# Altium PCB M3 ICE.PcbDoc (part 2 of 2)
Units mil, origin at the board's own origin, x right, y up, seen from the top; angles counter-clockwise.
Board outline 4160 x 4350 mil, 4 copper layers (Top Layer, Mid-Layer 1, Mid-Layer 2, Bottom Layer); 223 components, 229 nets, 850 pads, 124 vias.
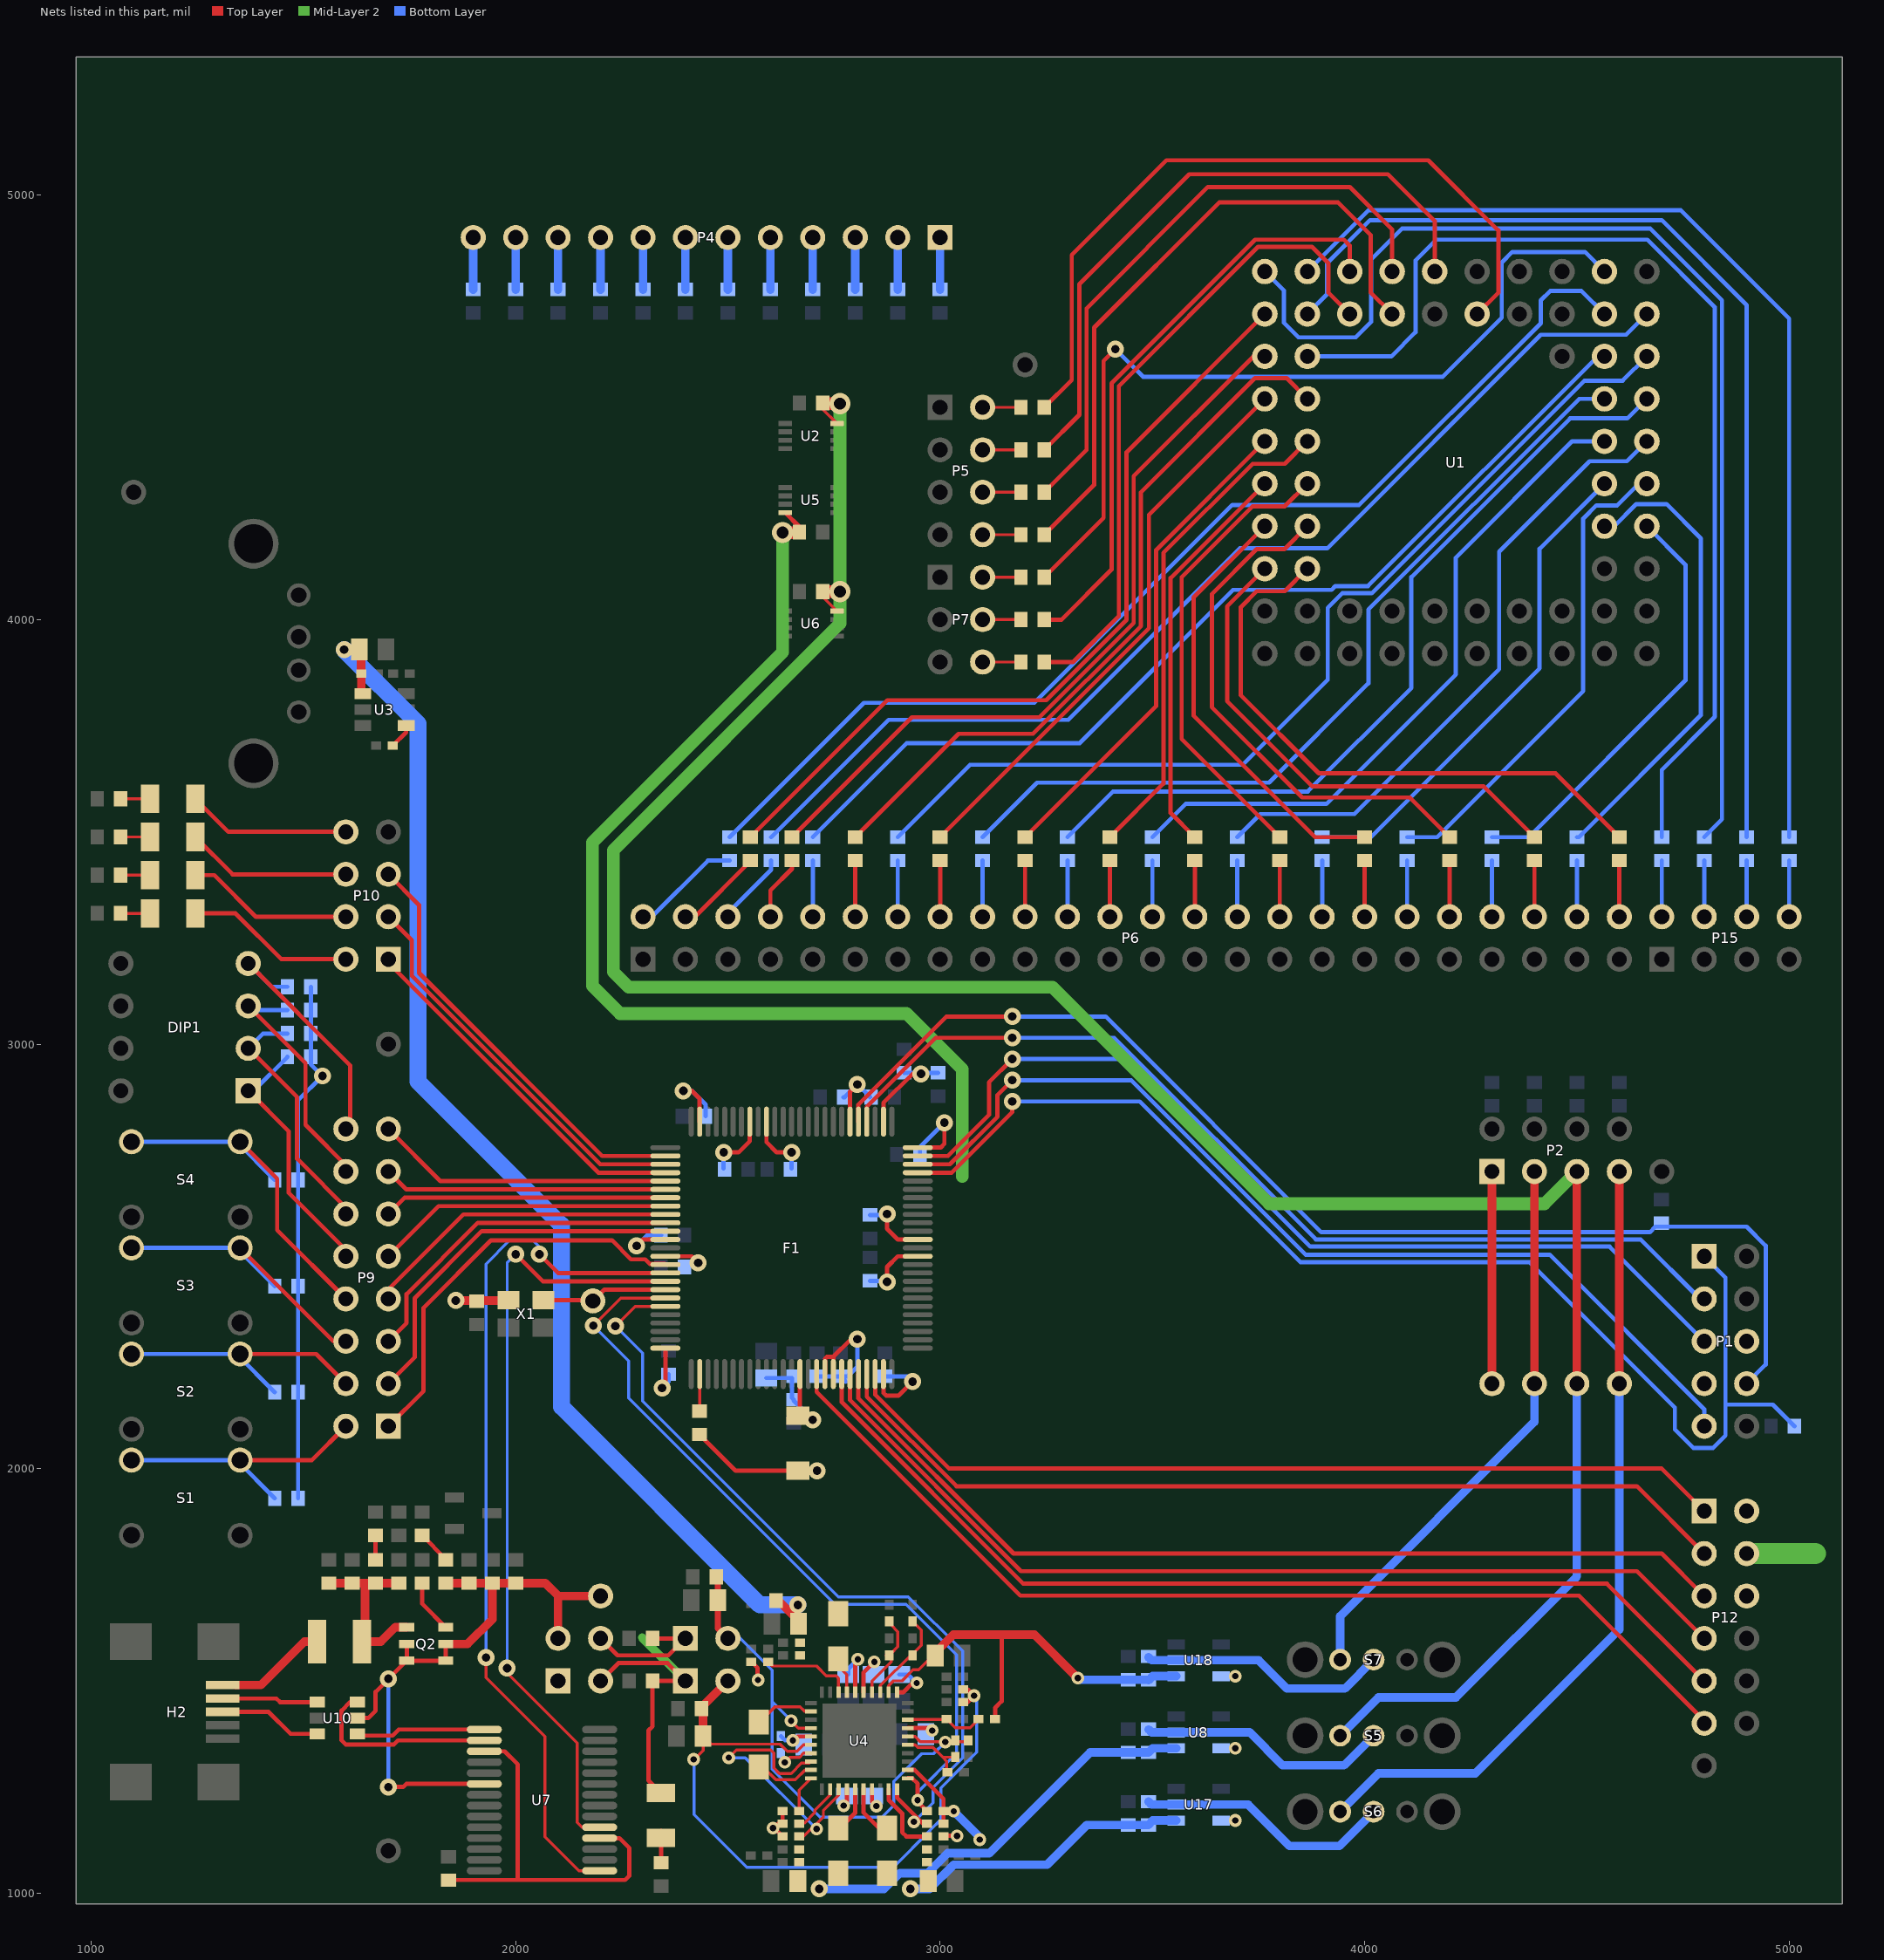
[diagram p4: the nets of this part, all layers, seen from the top]

## Via types
v1: diameter 40, hole 20, Top Layer to Bottom Layer, 71 vias
v2: diameter 30, hole 15, Top Layer to Bottom Layer, 40 vias
v3: diameter 50, hole 28, Top Layer to Bottom Layer, 9 vias
v4: diameter 200, hole 120, Top Layer to Bottom Layer, 4 vias

## Nets (pads, with @x,y where several pads share a name; then routed paths per layer and width w, separated by ;. In a path a pad name is that pad's centre, name@x,y a point inside that pad or via, vN(x,y) a via of type N, cw(c..) or ccw(c..) an arc to the next point about the centre after c; other vN are vias at no path point) (continued)
NetC48_2: C48.2 C51.2 F2.2 Q2.4 R61.2 R63.2 | length 424.6
  Top Layer w20: C51.2@1560,1730 R63.2@1615,1730 1645,1730 ; C48.2@1725,1730 R61.2@1670,1730 1645,1730 ; Q2.4@1743.46,1626.3 1716.3,1626.3 1682.56,1592.56 F2.2@1638.15,1592.56 1645,1599.41 1645,1730
NetC49_1: C49.1 R60.1 | length 77.8
  Top Layer w10: C49.1@1780,1842.44 R60.1@1835,1787.44
NetC50_2: C50.2 U7.4 U7.17 | length 932.8
  Top Layer w10: C50.2@1848,1031 2005,1031 ; U7.17@1926.17,1334.16 1973.84,1334.16 2005,1303 2005,1031 ; U7.4@2197.83,1129.43 2244.57,1129.43 2268,1106 2268,1041 2258,1031 2005,1031
NetC52_2: C52.2 R61.1 | length 57.3
  Top Layer w10: R61.1@1670,1785.12 C52.2@1670,1842.44
NetC62_2: C62.2 R56.1 U4.3 | length 213.7
  Top Layer w7: U4.3@2859.06,1473.35 2859.06,1488.85 R56.1@2932.76,1562.56 ; R56.1@2935,1563.18 2955.34,1583.52 2955.34,1619.97 C62.2@2935,1640.31
NetC63_2: C63.2 R57.1 U4.4 | length 190.5
  Top Layer w7: U4.4@2839.37,1473.35 2839.37,1499.37 2885,1545 C63.2@2885,1560.31 ; C63.2@2883.43,1563.66 2900.34,1580.58 2900.34,1615.85 R57.1@2884.3,1631.89
  Top Layer w15: C63.2@2877.21,1560.31 C63.2@2880,1560.31
NetDIP1_1: DIP1.1 P9.10 R69.2 | length 610
  Top Layer w10: DIP1.1@1370,2890 1465,2795 1465,2650 P9.10@1610,2505
  Bottom Layer w10: DIP1.1@1370,2890 1382.44,2890 R69.2@1462.44,2970
NetDIP1_2: DIP1.2 P9.12 R70.2 | length 591.3
  Top Layer w10: DIP1.2@1370,2990 1485,2875 1485,2730 P9.12@1610,2605
  Bottom Layer w10: DIP1.2@1370,2990 1405,3025 R70.2@1462.44,3025
NetDIP1_3: DIP1.3 P9.14 R71.2 | length 581
  Top Layer w10: DIP1.3@1370,3090 1505,2955 1505,2810 P9.14@1610,2705
  Bottom Layer w10: DIP1.3@1370,3090 1380,3080 R71.2@1462.44,3080
NetDIP1_4: DIP1.4 P9.16 R72.2 | length 599.6
  Top Layer w10: DIP1.4@1370,3190 1610,2950 P9.16@1610,2805
  Bottom Layer w10: DIP1.4@1370,3190 1425,3135 R72.2@1462.44,3135
NetF1_16: F1.16 P12.11 | length 2435.9
  Top Layer w10: F1.16@2709.06,2222.76 2709.06,2180.94 3189,1701 4505.25,1701 P12.11@4787.44,1418.81
NetF1_19: F1.19 P12.9 | length 2370
  Top Layer w10: F1.19@2768.11,2222.76 2768.11,2156.68 3195.79,1729 4571,1729 P12.9@4800,1500
NetF1_20: F1.20 P12.7 | length 2306.3
  Top Layer w10: F1.20@2787.8,2222.76 2787.8,2161.04 3190.36,1758.47 4641.53,1758.47 P12.7@4800,1600
NetF1_21: F1.21 P12.5 | length 2242.7
  Top Layer w10: F1.21@2807.48,2222.76 2807.48,2165.39 3172.88,1800 4700,1800 P12.5@4800,1700
NetF1_22: F1.22 P12.3 | length 2179
  Top Layer w10: F1.22@2827.17,2222.76 2827.17,2169.75 3038.44,1958.47 4641.53,1958.47 P12.3@4800,1800
NetF1_23: F1.23 P12.1 | length 2115.3
  Top Layer w10: F1.23@2846.85,2222.76 2846.85,2174.11 3020.96,2000 4700,2000 P12.1@4800,1900
NetF1_77: F1.77 P10.5 | length 1021.3
  Top Layer w10: P10.5@1700,3400 1772.5,3327.5 1772.5,3167.5 2203.46,2736.54 F1.77@2352.76,2736.54
NetF1_78: F1.78 P10.3 | length 943.5
  Top Layer w10: P10.3@1700,3300 1755.5,3244.5 1755.5,3160.46 2199.11,2716.85 F1.78@2352.76,2716.85
NetF1_79: F1.79 P10.1 | length 857.7
  Top Layer w10: P10.1@1700,3191.92 2194.75,2697.17 F1.79@2352.76,2697.17
NetF1_80: F1.80 P9.15 | length 703.5
  Top Layer w10: P9.15@1700,2800 1822.52,2677.48 F1.80@2352.76,2677.48
NetF1_81: F1.81 P9.13 | length 670.2
  Top Layer w10: P9.13@1700,2700 1742.2,2657.8 F1.81@2352.76,2657.8
NetF1_82: F1.82 P9.11 | length 668.5
  Top Layer w10: P9.11@1700,2600 1738.11,2638.11 F1.82@2352.76,2638.11
NetF1_83: F1.83 P9.9 | length 701.8
  Top Layer w10: P9.9@1700,2500 1818.43,2618.43 F1.83@2352.76,2618.43
NetF1_84: F1.84 P9.7 | length 760.8
  Top Layer w10: P9.7@1684.5,2393.58 1684.5,2406.42 1876.82,2598.74 F1.84@2352.76,2598.74
NetF1_85: F1.85 P9.5 | length 808.2
  Top Layer w10: P9.5@1700,2300 1743,2343 1743,2411 1911.06,2579.06 F1.85@2352.76,2579.06
NetF1_86: F1.86 P9.3 | length 883
  Top Layer w10: P9.3@1700,2200 1762,2262 1762,2401 1920.37,2559.37 F1.86@2352.76,2559.37
NetF1_90: F1.90 P9.1 | length 972.8
  Top Layer w10: P9.1@1700,2100 1783,2183 1783,2379 1942,2538 2226.75,2538 2271.75,2493 2305.22,2493 2315.81,2482.41 2350.98,2482.41 F1.90@2352.76,2480.63
NetF2_1: F2.1 H2.1 | length 234.3
  Top Layer w20: H2.1@1340,1490 1400,1490 1502.56,1592.56 F2.1@1531.85,1592.56
NetH2_2: H2.2 U10.1 | length 196.3
  Top Layer w10: H2.2@1340,1458.5 1436.5,1458.5 1445.04,1449.96 U10.1@1532.76,1449.96
NetH2_3: H2.3 U10.3 | length 214.2
  Top Layer w10: H2.3@1340,1427.01 1417.99,1427.01 1469.84,1375.16 U10.3@1532.76,1375.16
NetI1_1: I1.1 U4.7 | length 70.1
  Top Layer w7: I1.1@2760,1535 2780.32,1514.68 U4.7@2780.32,1473.35
NetI2_1: I2.1 U4.25 | length 108.5
  Top Layer w10: I2.1@2760,1158.94 2769.94,1158.94 2800,1189 U4.25@2800,1245
NetI3_1: I3.1 U4.26 | length 116.8
  Top Layer w10: U4.26@2819.68,1245 2819.68,1189.32 2855.85,1153.15 I3.1@2865.79,1153.15
NetI4_1: I4.1 U4.12 | length 140
  Top Layer w7: I4.1@2575,1403.15 2610.85,1439 2670,1439 2680.93,1428.07 U4.12@2695.67,1428.07
NetI4_2: I4.2 U4.19 | length 131.9
  Top Layer w7: I4.2@2585,1295 2613,1267 2658.53,1267 2681.8,1290.28 U4.19@2695.67,1290.28
NetLED1_1: LED1.1 P10.2 | length 399.6
  Top Layer w10: LED1.1@1245.15,3308 1340,3308 1448,3200 P10.2@1600,3200
NetLED1_2: LED1.2 R5.2 | length 69.3
  Top Layer w7: R5.2@1069.56,3308 LED1.2@1138.85,3308
NetLED2_1: LED2.1 P10.4 | length 395.4
  Top Layer w10: LED2.1@1245.15,3398 1290,3398 1388,3300 P10.4@1600,3300
NetLED2_2: LED2.2 R6.2 | length 69.3
  Top Layer w7: R6.2@1069.56,3398 LED2.2@1138.85,3398
NetLED3_1: LED3.1 P10.6 | length 391.3
  Top Layer w10: LED3.1@1245.15,3488 1333.15,3400 P10.6@1600,3400
NetLED3_2: LED3.2 R7.2 | length 69.3
  Top Layer w7: R7.2@1069.56,3488 LED3.2@1138.85,3488
NetLED4_1: LED4.1 P10.8 | length 387.2
  Top Layer w10: LED4.1@1245.15,3578 1323.15,3500 P10.8@1600,3500
NetLED4_2: LED4.2 R8.2 | length 69.3
  Top Layer w7: R8.2@1069.56,3578 LED4.2@1138.85,3578
NetLED9_2: LED9.2 R98.2 | length 75.3
  Top Layer w10: R98.2@2343,1071.56 LED9.2@2343,1146.85
NetP4_1: P4.1 R77.1 | length 122.4
  Bottom Layer w20: R77.1@3000,4777.56 P4.1@3000,4900
NetP4_2: P4.2 R78.1 | length 122.4
  Bottom Layer w20: R78.1@2900,4777.56 P4.2@2900,4900
NetP4_3: P4.3 R79.1 | length 122.4
  Bottom Layer w20: R79.1@2800,4777.56 P4.3@2800,4900
NetP4_4: P4.4 R80.1 | length 122.4
  Bottom Layer w20: R80.1@2700,4777.56 P4.4@2700,4900
NetP4_5: P4.5 R81.1 | length 122.4
  Bottom Layer w20: R81.1@2600,4777.56 P4.5@2600,4900
NetP4_6: P4.6 R82.1 | length 122.4
  Bottom Layer w20: R82.1@2500,4777.56 P4.6@2500,4900
NetP4_7: P4.7 R83.1 | length 122.4
  Bottom Layer w20: R83.1@2400,4777.56 P4.7@2400,4900
NetP4_8: P4.8 R84.1 | length 122.4
  Bottom Layer w20: R84.1@2300,4777.56 P4.8@2300,4900
NetP4_9: P4.9 R85.1 | length 122.4
  Bottom Layer w20: R85.1@2200,4777.56 P4.9@2200,4900
NetP4_10: P4.10 R95.1 | length 122.4
  Bottom Layer w20: R95.1@2100,4777.56 P4.10@2100,4900
NetP4_11: P4.11 R96.1 | length 122.4
  Bottom Layer w20: R96.1@2000,4777.56 P4.11@2000,4900
NetP4_12: P4.12 R97.1 | length 122.4
  Bottom Layer w20: R97.1@1900,4777.56 P4.12@1900,4900
NetP5_2: P5.2 R41.2 | length 90.4
  Top Layer w7: P5.2@3100,4500 R41.2@3190.44,4500
NetP5_4: P5.4 R42.2 | length 90.4
  Top Layer w7: P5.4@3100,4400 R42.2@3190.44,4400
NetP5_6: P5.6 R92.2 | length 90.4
  Top Layer w7: P5.6@3100,4300 R92.2@3190.44,4300
NetP5_8: P5.8 R99.2 | length 90.4
  Top Layer w7: P5.8@3100,4200 R99.2@3190.44,4200
NetP6_2: P6.2 R17.2 | length 258.9
  Bottom Layer w10: P6.2@2300,3300 2320.56,3300 2453,3432.44 R17.2@2504,3432.44
NetP6_4: P6.4 R18.2 | length 185.3
  Top Layer w10: P6.4@2421.99,3300 R18.2@2553,3431.01
NetP6_6: P6.6 R19.2 | length 174.7
  Bottom Layer w10: P6.6@2500,3300 2500,3309 2602,3411 R19.2@2602,3432.44
NetP6_8: P6.8 R20.2 | length 153.6
  Top Layer w10: P6.8@2600,3300 2600,3362 2651,3413 R20.2@2651,3432.44
NetP6_10: P6.10 R21.2 | length 132.4
  Bottom Layer w10: P6.10@2700,3300 R21.2@2700,3432.44
NetP6_12: P6.12 R22.2 | length 132.4
  Top Layer w10: P6.12@2800,3300 R22.2@2800,3432.44
NetP6_14: P6.14 R23.2 | length 132.4
  Bottom Layer w10: P6.14@2900,3300 R23.2@2900,3432.44
NetP6_16: P6.16 R24.2 | length 132.4
  Top Layer w10: P6.16@3000,3300 R24.2@3000,3432.44
NetP6_18: P6.18 R25.2 | length 132.4
  Bottom Layer w10: P6.18@3100,3300 R25.2@3100,3432.44
NetP6_20: P6.20 R26.2 | length 132.4
  Top Layer w10: P6.20@3200,3300 R26.2@3200,3432.44
NetP6_22: P6.22 R27.2 | length 132.4
  Bottom Layer w10: P6.22@3300,3300 R27.2@3300,3432.44
NetP6_24: P6.24 R28.2 | length 132.4
  Top Layer w10: P6.24@3400,3300 R28.2@3400,3432.44
NetP6_26: P6.26 R29.2 | length 132.4
  Bottom Layer w10: P6.26@3500,3300 R29.2@3500,3432.44
NetP6_28: P6.28 R30.2 | length 132.4
  Top Layer w10: P6.28@3600,3300 R30.2@3600,3432.44
NetP6_30: P6.30 R31.2 | length 132.4
  Bottom Layer w10: P6.30@3700,3300 R31.2@3700,3432.44
NetP6_32: P6.32 R32.2 | length 132.4
  Top Layer w10: P6.32@3800,3300 R32.2@3800,3432.44
NetP6_34: P6.34 R33.2 | length 132.4
  Bottom Layer w10: P6.34@3900,3300 R33.2@3900,3432.44
NetP6_36: P6.36 R34.2 | length 132.4
  Top Layer w10: P6.36@4000,3300 R34.2@4000,3432.44
NetP6_38: P6.38 R35.2 | length 132.4
  Bottom Layer w10: P6.38@4100,3300 R35.2@4100,3432.44
NetP6_40: P6.40 R36.2 | length 132.4
  Top Layer w10: P6.40@4200,3300 R36.2@4200,3432.44
NetP6_42: P6.42 R37.2 | length 132.4
  Bottom Layer w10: P6.42@4300,3300 R37.2@4300,3432.44
NetP6_44: P6.44 R38.2 | length 132.4
  Top Layer w10: P6.44@4400,3300 R38.2@4400,3432.44
NetP6_46: P6.46 R39.2 | length 132.4
  Bottom Layer w10: P6.46@4500,3300 R39.2@4500,3432.44
NetP6_48: P6.48 R40.2 | length 132.4
  Top Layer w10: P6.48@4600,3300 R40.2@4600,3432.44
NetP7_2: P7.2 R100.2 | length 90.4
  Top Layer w7: P7.2@3100,4100 R100.2@3190.44,4100
NetP7_4: P7.4 R101.2 | length 90.4
  Top Layer w7: P7.4@3100,4000 R101.2@3190.44,4000
NetP7_6: P7.6 R102.2 | length 90.4
  Top Layer w7: P7.6@3100,3900 R102.2@3190.44,3900
NetP9_2: P9.2 R65.2 S1.1 | length 657
  Top Layer w10: S1.1@1350.91,2020 1520,2020 P9.2@1600,2100
  Bottom Layer w10: S1.1@1095,2020 1342.44,2020 R65.2@1432.44,1930
NetP9_4: P9.4 R66.2 S2.1 | length 652.8
  Top Layer w10: S2.1@1350.91,2270 1530,2270 P9.4@1600,2200
  Bottom Layer w10: S2.1@1095,2270 1342.44,2270 R66.2@1432.44,2180
NetP9_6: P9.6 R67.2 S3.1 | length 714.9
  Top Layer w10: S3.1@1350.91,2520 1570.91,2300 P9.6@1600,2300
  Bottom Layer w10: S3.1@1095,2520 1342.44,2520 R67.2@1432.44,2430
NetP9_8: P9.8 R68.2 S4.1 | length 847.9
  Top Layer w10: S4.1@1350.91,2770 1438,2682.91 1438,2562 P9.8@1600,2400
  Bottom Layer w10: S4.1@1095,2770 1342.44,2770 R68.2@1432.44,2680
NetP15_2: P15.2 R73.2 | length 132.4
  Bottom Layer w10: P15.2@4700,3300 R73.2@4700,3432.44
NetP15_4: P15.4 R74.2 | length 132.4
  Bottom Layer w10: P15.4@4800,3300 R74.2@4800,3432.44
NetP15_6: P15.6 R75.2 | length 132.4
  Bottom Layer w10: P15.6@4900,3300 R75.2@4900,3432.44
NetP15_8: P15.8 R76.2 | length 132.4
  Bottom Layer w10: P15.8@5000,3300 R76.2@5000,3432.44
NetQ2_3: Q2.3 R59.2 | length 126.5
  Top Layer w10: R59.2@1780,1730 1780,1681.3 Q2.3@1835,1626.3
NetR1_1: R1.1 S5.2 U8.2 | length 594.3
  Bottom Layer w20: R1.1@3491,1385.56 3497.99,1378.57 U8.2@3556,1378.57 3729.43,1378.57 3807,1301 3951.26,1301 S5.2@4021.26,1371
NetR2_1: R2.1 S6.2 U17.2 | length 607.1
  Bottom Layer w20: R2.1@3491,1215.56 3497.99,1208.57 U17.2@3556,1208.57 3725.57,1208.57 3823.14,1111 3940.26,1111 S6.2@4021.26,1192
NetR3_1: R3.1 S7.2 U18.2 | length 588.9
  Bottom Layer w20: R3.1@3491,1555.56 3497.99,1548.57 U18.2@3556,1548.57 3750.43,1548.57 3817,1482 3953.26,1482 S7.2@4021.26,1550
NetR17_1: R17.1 U1.B2 | length 2647.9
  Bottom Layer w10: R17.1@2504,3487.56 2820.44,3804 3222,3804 3688,4270 3987,4270 4415,4698 4415,4752 4437,4774 4511,4774 U1.B2@4565,4720
NetR18_1: R18.1 U1.K2 | length 1953.8
  Top Layer w10: R18.1@2553,3487.56 2875.44,3810 3249.92,3810 3439,3999.08 3439,4394 U1.K2@3765,4720
NetR19_1: R19.1 U1.A2 | length 2573.5
  Bottom Layer w10: R19.1@2602,3487.56 2878.44,3764 3302,3764 3706,4168 3912,4168 4415,4671 4616,4671 U1.A2@4665,4720
NetR20_1: R20.1 U1.K3 | length 1785.7
  Top Layer w10: R20.1@2651,3487.56 2933.44,3770 3233.96,3770 3456,3992.04 3456,4338 3738,4620 U1.K3@3765,4620
NetR21_1: R21.1 U1.B3 | length 2329.4
  Bottom Layer w10: R21.1@2700,3487.56 2921.44,3709 3329,3709 3690,4070 3922,4070 3931,4079 4008,4079 U1.B3@4557,4628
NetR22_1: R22.1 U1.J4 | length 1717.8
  Top Layer w10: R22.1@2800,3487.56 3043.44,3731 3219,3731 3473,3985 3473,4300 3742,4569 3816,4569 U1.J4@3865,4520
NetR23_1: R23.1 U1.A3 | length 2333.7
  Bottom Layer w10: R23.1@2900,3487.56 3070.44,3658 3713,3658 3913,3858 3913,4028 3947,4062 4017,4062 4518,4563 4608,4563 U1.A3@4665,4620
NetR24_1: R24.1 U1.K4 | length 1349.3
  Top Layer w10: R24.1@3000,3487.56 3492,3979.56 3492,4247 U1.K4@3765,4520
NetR25_1: R25.1 U1.B4 | length 1994.2
  Bottom Layer w10: R25.1@3100,3487.56 3228.44,3616 3775,3616 4009,3850 4009,4023.4 4505.6,4520 U1.B4@4565,4520
NetR26_1: R26.1 U1.K5 | length 1166.5
  Top Layer w10: R26.1@3200,3487.56 3509,3796.56 3509,4164 U1.K5@3765,4420
NetR27_1: R27.1 U1.A4 | length 1945.5
  Bottom Layer w10: R27.1@3300,3487.56 3407.44,3595 3866,3595 4110,3839 4110,4099.96 4484.04,4474 4619,4474 U1.A4@4665,4520
NetR28_1: R28.1 U1.J5 | length 1169.5
  Top Layer w10: R28.1@3400,3487.56 3526,3613.56 3526,4156.96 3736.04,4367 3812,4367 U1.J5@3865,4420
NetR29_1: R29.1 U1.B5 | length 1612.3
  Bottom Layer w10: R29.1@3500,3487.56 3578.44,3566 3910,3566 4215,3871 4215,4146 4489,4420 U1.B5@4565,4420
NetR30_1: R30.1 U1.K6 | length 948
  Top Layer w10: R30.1@3600,3487.56 3543,3544.56 3543,4098 U1.K6@3765,4320
NetR31_1: R31.1 U1.A5 | length 1513.5
  Bottom Layer w10: R31.1@3700,3487.56 3754.44,3542 3976,3542 4317,3883 4317,4160 4530,4373 4618,4373 U1.A5@4665,4420
NetR32_1: R32.1 U1.J6 | length 1095.2
  Top Layer w10: R32.1@3800,3487.56 3569,3718.56 3569,4099.96 3736.04,4267 3812,4267 U1.J6@3865,4320
NetR33_1: R33.1 U1.B6 | length 1175
  Bottom Layer w10: R33.1@3900,3487.56 4014.56,3487.56 4412,3885 4412,4167 U1.B6@4565,4320
NetR34_1: R34.1 U1.K7 | length 1037.2
  Top Layer w10: U1.K7@3765,4220 3597,4052 3597,3774 3883.44,3487.56 R34.1@4000,3487.56
NetR35_1: R35.1 U1.A6 | length 1147.6
  Bottom Layer w10: R35.1@4100,3487.56 4170.56,3487.56 4515,3832 4515,4238 4546,4269 4595,4269 4646,4320 U1.A6@4665,4320
NetR36_1: R36.1 U1.J7 | length 1244.2
  Top Layer w10: U1.J7@3865,4220 3811,4166 3746,4166 3640,4060 3640,3794 3853,3581 4106.56,3581 R36.1@4200,3487.56
NetR37_1: R37.1 U1.A7 | length 1009.7
  Bottom Layer w10: R37.1@4300,3487.56 4386.56,3487.56 4756,3857 4756,4129 U1.A7@4665,4220
NetR38_1: R38.1 U1.K8 | length 1205.6
  Top Layer w10: U1.K8@3765,4120 3676,4031 3676,3808 3877,3607 4280.56,3607 R38.1@4400,3487.56
NetR39_1: R39.1 U1.B7 | length 1109.2
  Bottom Layer w10: R39.1@4500,3487.56 4504.56,3487.56 4792,3775 4792,4191 4711,4272 4640,4272 4588,4220 U1.B7@4565,4220
NetR40_1: R40.1 U1.J8 | length 1431.8
  Top Layer w10: U1.J8@3865,4120 3812,4067 3746,4067 3708.52,4029.52 3708.52,3821.48 3892,3638 4449.56,3638 R40.1@4600,3487.56
NetR41_1: R41.1 U1.E2 | length 1769.1
  Top Layer w10: R41.1@3245.56,4500 3310,4564.44 3310,4859 3533,5082 4150,5082 4315,4917 4315,4770 U1.E2@4265,4720
NetR42_1: R42.1 U1.F1 | length 1533
  Top Layer w10: R42.1@3245.56,4400 3328,4482.44 3328,4790 3587,5049 4055,5049 4165,4939 U1.F1@4165,4820
NetR51_2: R51.2 R53.1 U4.38 | length 183
  Top Layer w7: U4.38@2924.02,1408.39 2924.63,1409 R53.1@3015.32,1409 ; R53.1@3015.32,1410 3035.66,1389.66 3070.85,1389.66 R51.2@3090.31,1409.13
NetR54_2: R54.2 R55.1 U4.35 | length 163.4
  Top Layer w7: U4.35@2924.02,1349.33 2940.67,1349.33 2947,1343 2982.86,1343 3005.55,1320.32 ; R54.2@3015.31,1285 3015.31,1310.55 3005.55,1320.32 ; R55.1@3036,1320.32 3005.55,1320.32
NetR73_1: R73.1 U1.J3 | length 2539
  Bottom Layer w10: U1.J3@3865,4620 4063,4620 4120,4677 4120,4846 4169,4895 4666,4895 4825,4736 4825,3771 4700,3646 R73.1@4700,3487.56
NetR74_1: R74.1 U1.K1 | length 2729.7
  Bottom Layer w10: U1.K1@3765,4820 3810,4775 3810,4699 3844,4665 3979,4665 4015,4701 4015,4848 4088,4921 4673,4921 4842,4752 4842,3529.56 R74.1@4800,3487.56
NetR75_1: R75.1 U1.J2 | length 2505.6
  Bottom Layer w10: U1.J2@3865,4720 3911,4766 3911,4839 4013,4941 4700,4941 4900,4741 R75.1@4900,3487.56
NetR76_1: R76.1 U1.J1 | length 2521.7
  Bottom Layer w10: U1.J1@3865,4820 4009,4964 4745,4964 5000,4709 R76.1@5000,3487.56
NetR88_1: R88.1 U4.22 | length 105.2
  Top Layer w7: 2680,1165 2705,1190 2705,1195 2740.94,1230.94 U4.22@2740.94,1245
NetR89_1: R89.1 U4.29 | length 168.6
  Top Layer w10: U4.29@2878.74,1245 2878.74,1219.53 2910.62,1187.65 2910.62,1143.19 2920.47,1133.35 R89.1@2960.12,1133.35
NetR90_1: R90.1 U4.17 | length 68.8
  Top Layer w7: v2@2635,1310 2645,1320 2668.86,1320 2678.51,1329.65 U4.17@2695.67,1329.65
  other v2: 2634,1308
NetR91_1: R91.1 U4.8 | length 214.9
  Top Layer w7: R91.1@2594.68,1545 2604.68,1535 2708.85,1535 2732.03,1511.82 2755,1511.82 2760.63,1506.19 U4.8@2760.63,1473.35
NetR92_1: R92.1 U1.G1 | length 1453.1
  Top Layer w10: R92.1@3245.56,4300 3345,4399.44 3345,4733 3631,5019 3965,5019 4065,4919 U1.G1@4065,4820
NetR93_2: R93.2 U4.20 | length 88.7
  Top Layer w7: R93.2@2668.11,1193.35 2668.11,1243.03 U4.20@2695.67,1270.59
NetR94_1: R94.1 U3.1 | length 60.6
  Top Layer w10: R94.1@1710.68,3703 1742.18,3734.5 U3.1@1742.18,3750.6
NetR99_1: R99.1 U1.G2 | length 1548.9
  Top Layer w10: R99.1@3245.56,4200 3363,4317.44 3363,4688 3658,4983 3937,4983 4014,4906 4014,4771 U1.G2@4065,4720
NetR100_1: R100.1 U1.B1 | length 2002.3
  Top Layer w10: R100.1@3245.56,4100 3385,4239.44 3385,4609 v1(3413,4637)
  Bottom Layer w10: v1(3413,4637) 3478,4572 4184,4572 4323,4711 4323,4841 4348,4866 4519,4866 U1.B1@4565,4820
NetR101_1: R101.1 U1.H1 | length 1414.1
  Top Layer w10: R101.1@3245.56,4000 3286,4000 3404,4118 3404,4557 3742,4895 3951,4895 3965,4881 U1.H1@3965,4820
NetR102_1: R102.1 U1.H2 | length 1547.9
  Top Layer w10: R102.1@3245.56,3900 3313,3900 3421,4008 3421,4549.96 3749.04,4878 3876,4878 3915,4839 3915,4770 U1.H2@3965,4720
NetU7_15: U7.15 U10.4 | length 306.6
  Top Layer w10: U10.4@1627.24,1375.16 1631.46,1370.94 1710,1370.94 1724.39,1385.34 U7.15@1926.17,1385.34
NetU7_16: U7.16 U10.6 | length 459.6
  Top Layer w10: U10.6@1627.24,1449.96 1609.96,1449.96 1590,1430 1590,1360 1599.64,1350.36 1713.46,1350.36 1722.84,1359.75 U7.16@1926.17,1359.75
PMU_SCL: F1.95 R58.1 U4.30 | length 1895.2
  Top Layer w7: v1(2235,2336) 2281.2,2382.2 F1.95@2352.76,2382.2
  Top Layer w10: U4.30@2898.43,1245 2898.43,1225.04 R58.1@2960.12,1163.35
  Bottom Layer w7: v1(2235,2336) 2299,2272 2299,2159 2760,1698 2925,1698 3053,1570 3053,1319 2983,1249 2983,1213 v2(2938,1168)
PMU_SDA: F1.94 R86.1 U4.31 | length 1907.6
  Top Layer w7: v1(2183,2337) 2247.89,2401.89 F1.94@2352.76,2401.89
  Top Layer w10: U4.31@2924.02,1270.59 2934.41,1270.59 2947,1258 v2(2947,1219) 2947,1215.09 R86.1@2968.74,1193.35
  Bottom Layer w7: v1(2183,2337) 2266,2254 2266,2166 2752,1680 2920,1680 3039,1561 3039,1330 2947,1238 v2(2947,1219)
POR: F1.2 R9.1 | length 86.7
  Top Layer w7: R9.1@2433.46,2136.02 F1.2@2433.46,2222.76
SYS_CLK: F1.93 TP1.1 X1.3 | length 296.1
  Top Layer w10: X1.3@2065.68,2396.96 TP1.1@2180.04,2396.96 ; TP1.1@2182,2395 2208.57,2421.57 F1.93@2352.76,2421.57
TCK: F1.47 P1.1 R10.1 | length 2993.8
  Top Layer w10: F1.47@2947.24,2697.17 3027.17,2697.17 3170,2840 v1(3170,2865)
  Bottom Layer w10: v1(3170,2865) 3470,2865 3849,2486 4389,2486 4731,2144 4731,2092 4774,2049 4821,2049 4850,2078 4850,2151 ; P1.1@4800,2500 4850,2450 4850,2151 ; R10.1@5012.56,2100 4961.56,2151 4850,2151
TDI: F1.48 P1.9 | length 2325.7
  Top Layer w10: F1.48@2947.24,2716.85 3022.81,2716.85 3135,2829.04 3135,2880 v1(3170,2915)
  Bottom Layer w10: v1(3170,2915) 3450,2915 3861,2504 4436,2504 4800,2140 P1.9@4800,2100
TDO: F1.54 P1.3 | length 2320.1
  Top Layer w10: F1.54@2827.17,2817.24 2827.17,2852.41 2989.76,3015 v1(3170,3015)
  Bottom Layer w10: v1(3170,3015) 3410,3015 3885,2540 4650,2540 P1.3@4790,2400
TMS: F1.49 P1.5 | length 2267.9
  Top Layer w10: F1.49@2947.24,2736.54 3018.45,2736.54 3115,2833.08 3115,2910 v1(3170,2965)
  Bottom Layer w10: v1(3170,2965) 3430,2965 3872,2523 4577,2523 P1.5@4800,2300
TRST: F1.55 P1.8 R11.1 | length 2841.8
  Top Layer w10: F1.55@2807.48,2817.24 2807.48,2857.48 3015,3065 v1(3170,3065)
  Bottom Layer w10: v1(3170,3065) 3390,3065 3898,2557 4672,2557 4685,2570 4900,2570 4945,2525 4945,2245 P1.8@4900,2200
USB_UART_RXD: F1.92 U7.5 | length 1866.9
  Top Layer w7: v1(1980,1530) 1980,1519 2145,1354 2145,1166.43 2156.41,1155.02 U7.5@2197.83,1155.02
  Top Layer w10: v1(2000,2505) 2063.74,2441.26 F1.92@2352.76,2441.26
  Bottom Layer w7: v1(1980,1530) 1980,2485 v1(2000,2505) v1@2015,2505
USB_UART_TXD: F1.91 U7.1 | length 2062.7
  Top Layer w7: v1(1930,1555) 1930,1508 2069,1369 2069,1133 2149.34,1052.66 U7.1@2197.83,1052.66
  Top Layer w10: v1(2056,2505) 2100.06,2460.94 F1.91@2352.76,2460.94
  Bottom Layer w7: v1(1930,1555) 1930,2482 1985,2537 2041,2537 v1@2073,2505
VCC_1P2: C3.2 C4.2 C5.2 C6.2 C9.2 C10.2 C11.2 C12.2 C13.2 C14.2 C26.2 C54.2 F1.17 F1.18 F1.24 F1.37 F1.39 F1.50 F1.66 F1.68 F1.74 F1.89 FB1.1 P12.2 P16.1 R9.2 TP18.1 U5.8 | length 4807.1
  Top Layer w10: TP18.1@2200,1600 2240,1560 2360,1560 P16.1@2400,1600 C26.2@2322.56,1600 ; F1.89@2352.76,2500.32 2414.68,2500.32 v1(2430,2485) ; v1(2395,2890) 2415,2890 2433.46,2871.54 F1.74@2433.46,2817.24 ; R9.2@2433,2080.44 2518.44,1995 FB1.1@2665,1995 ; v1(2490,2745) 2525,2745 2551.57,2771.57 F1.68@2551.57,2817.24 ; F1.66@2590.94,2817.24 2590.94,2769.06 2615,2745 v1(2650,2745) ; U5.8@2635,4252 2668.44,4218.56 C54.2@2668.44,4206 ; F1.17@2728.74,2222.76 2728.74,2258.74 2733.43,2263.43 2748.43,2263.43 ; F1.18@2748.43,2222.76 2748.43,2263.43 ; v1(2805,2305) 2790,2305 2748.43,2263.43 ; F1.24@2866.54,2222.76 2866.54,2178.46 2873,2172 2902,2172 v1(2935,2205) ; v1(2875,2440) 2875,2475 2900.32,2500.32 F1.37@2947.24,2500.32 ; v1(2875,2600) 2875,2565 2900.32,2539.68 F1.39@2947.24,2539.68 ; F1.50@2947.24,2756.22 3001.22,2756.22 3010,2765 v1(3010,2815)
  Top Layer w30: v3(2629,4205) C54.2@2667.44,4205
  Mid-Layer 2 w30: v3(2629,4205) 2629,3923 2181,3475 2181,3137 2246,3072 2921,3072 3052,2941 3052,2688
  Bottom Layer w10: v1(2395,2890) 2415,2890 2447.56,2857.44 C10.2@2447.56,2830 ; C5.2@2490,2707.44 v1(2490,2745) ; C9.2@2650,2707.44 v1(2650,2745) ; C3.2@2710,2217.44 C13.2@2765,2217.44 ; C13.2@2777.44,2205 C13.2@2765,2217.44 ; v1(2805,2305) 2805,2240 2782.44,2217.44 C13.2@2765,2217.44 ; C4.2@2835,2442.44 v1@2872.56,2442.44 ; C11.2@2835,2597.56 v1@2872.56,2597.56 ; C14.2@2870,2217.44 2922.56,2217.44 v1(2935,2205) ; C12.2@2952.56,2740 2952.56,2757.56 v1(3010,2815)
  other v1: 2710,1995
VCC_B0: C1.2 C7.2 C8.2 C17.2 C18.2 C19.2 C20.2 C34.2 F1.52 F1.56 F1.87 F1.100 LED9.1 P1.6 P1.7 P11.1 P12.4 R58.2 R65.1 R66.1 R67.1 R68.1 R69.1 R70.1 R71.1 R72.1 R86.2 TP17.1 U4.32 X1.4 | length 3214.5
  Top Layer w10: TP17.1@2200,1500 2242,1542 2358,1542 P11.1@2400,1500 C34.2@2322.56,1500 2322.56,1392.81 2313,1383.25 2313,1265.15 LED9.1@2342,1236.15 ; v1(2285,2525) 2299.68,2539.68 F1.87@2352.76,2539.68 ; v1(2345,2190) 2352.76,2197.76 F1.100@2352.76,2283.78 ; F1.56@2787.8,2817.24 2787.8,2887.8 v1(2805,2905) ; F1.52@2866.54,2817.24 2866.54,2861.54 2935,2930 v1(2955,2930) ; U4.32@2924.02,1290.28 2940,1290.28 3008.11,1222.17 R58.2@3008.11,1163.35
  Top Layer w20: v1(1859,2396) X1.4@1982.04,2396
  Mid-Layer 2 w20: 2298,1602 P11.1@2400,1500
  Mid-Layer 2 w50: P12.4@4900,1800 5062,1800
  Bottom Layer w10: R65.1@1487.56,1930 R66.1@1487.56,2180 R67.1@1487.56,2430 R68.1@1487.56,2680 1487.56,2867.56 v1(1545,2925) 1517.56,2952.44 R69.1@1517.56,2970 R70.1@1517.56,3025 R71.1@1517.56,3080 R72.1@1517.56,3135 ; v1(2285,2525) 2310,2550 C7.2@2342.44,2550 ; v1(2345,2190) 2360,2205 C8.2@2360,2222.44 ; C20.2@2772.56,2875 2775,2875 v1(2805,2905) C18.2@2835,2875 ; C19.2@2915,2932.44 v1@2952.56,2932.44 ; v1@2957.56,2932.56 C17.2@2995,2932.56
  Bottom Layer w20: v2(3032,1193) v2@3093,1132
  other v2: 3093,1126
VCC_GOC: C25.2 C27.2 C61.1 I1.2 R12.1 R14.2 R15.1 U3.4 | length 2927.3
  Top Layer w20: C61.1@1631.5,3930 1636,3925.5 1636,3873.32 R12.1@1636.32,3873 U3.4@1636.32,3828.91 ; R14.2@2607.56,1689 2618.82,1689 C27.2@2666.5,1641.33
  Bottom Layer w40: v1(1596,3929) 1770,3755 1770,2912 2108,2574 2108,2146 2575,1679 v1(2665,1679)
VCC_M3_0P6: P2.3 S7.3 TP21.1 | length 1339.5
  Top Layer w20: TP21.1@4400,2200 P2.3@4400,2700
  Bottom Layer w20: S7.3@3942.52,1550 3942.52,1652.52 4400,2110 TP21.1@4400,2200
VCC_M3_1P2: C31.2 C55.2 P2.5 S5.3 TP16.1 U2.8 U6.8 | length 5965.3
  Top Layer w7: C55.2@2723.56,4066 2723.56,4053.49 U6.8@2757.05,4020 ; C31.2@2723.56,4510 2723.56,4495.49 U2.8@2757.05,4462
  Top Layer w20: TP16.1@4500,2200 P2.5@4500,2700
  Top Layer w30: C55.2@2723.56,4066 v3(2764,4066) ; C31.2@2724.56,4509 v3(2764,4509)
  Mid-Layer 2 w30: v3@2764,4518 2764,3991 2230,3457 2230,3170 2266,3134 3265,3134 3775,2624 4424,2624 P2.5@4500,2700
  Bottom Layer w20: S5.3@3942.52,1371 4032.52,1461 4215,1461 4500,1746 TP16.1@4500,2200
VCC_M3_VBATT: P2.7 S6.3 TP14.1 | length 1914.2
  Top Layer w20: TP14.1@4600,2200 P2.7@4600,2700
  Bottom Layer w20: S6.3@3942.52,1192 4032.52,1282 4261,1282 4600,1621 TP14.1@4600,2200
VCC_PLF: C2.2 C15.2 C16.2 F1.14 FB1.2 | length 267.4
  Top Layer w10: FB1.2@2669.68,2129.61 F1.14@2669.68,2222.76
  Bottom Layer w10: C2.2@2590,2213.5 2651.06,2213.5 C15.2@2651.06,2166.5 ; C15.2@2655,2162.56 2655,2160 v1(2700,2115)
VCC_PRE: C30.1 C33.1 C37.1 C39.1 C40.1 C42.1 C43.1 P8.1 P12.6 R87.2 R88.2 R89.2 R90.2 R91.2 R93.1 U4.1 U4.5 U4.6 U4.15 U4.24 U4.27 U4.37 U8.5 U17.5 U18.5 | length 676.8
  Top Layer w10: R91.2@2555.31,1545 2570,1530.31 v2@2570,1505 ; R87.2@2628.74,1133.35 2612.09,1150 2605,1150 2618.35,1163.35 R88.2@2628.74,1163.35 R93.1@2628.74,1193.35 ; v2@2655,1360 2664.02,1369.02 U4.15@2695.67,1369.02 ; v2@2775,1210 2780.31,1215.31 U4.24@2780.31,1245 ; U4.6@2800,1473.35 v2@2800,1540 ; U4.5@2819.68,1473.35 2819.68,1519.68 v2(2845,1545) ; U4.27@2839.37,1245 2839.37,1215.63 v2(2850,1205) ; U4.1@2898.43,1473.35 2913.35,1473.35 2935,1495 v2(2945,1495) ; U4.37@2924.02,1388.7 v2@2976.3,1388.7 ; R89.2@3009.76,1135 v2(3040,1135)
  Bottom Layer w10: R90.2@2625,1369.69 2634.69,1360 v2@2655,1360 ; C33.1@2783.43,1514.84 2783.43,1528.43 v2@2805,1550 ; C42.1@2903.43,1514.84 2925.16,1514.84 v2(2945,1495)
  other v2: 2606,1153 3695,1171.2 2773,1206 3695,1341.2 2653,1360 2981,1383 2571,1502 3695,1511.2 2806,1551
VCC_SOL: P2.1 TP27.1 | length 500
  Top Layer w20: TP27.1@4300,2200 P2.1@4300,2700
VCC_USB: C46.2 C47.2 C53.2 P8.2 Q2.1 Q2.2 Q2.5 Q2.6 R60.2 TP19.1 U7.20 U10.5 | length 1549
  Top Layer w10: U10.5@1627.24,1412.56 1652.56,1412.56 1670,1430 1670,1474.09 Q2.6@1743.46,1547.56 ; v1(1700,1250) 1735,1250 1742.39,1257.39 U7.20@1926.17,1257.39 ; Q2.5@1743.46,1586.93 Q2.6@1743.46,1547.56 ; Q2.2@1835,1586.93 Q2.1@1835,1547.56 Q2.6@1743.46,1547.56
  Top Layer w20: Q2.2@1835,1586.93 1886.93,1586.93 1945,1645 C46.2@1945,1730 ; R60.2@1835,1730 C47.2@1890,1730 C46.2@1945,1730 ; P8.2@2100,1600 2100,1700 ; TP19.1@2200,1700 2100,1700 ; C46.2@1945,1730 C53.2@2000,1730 2070,1730 2100,1700
  Bottom Layer w10: v1(1700,1250) v1(1700,1505)
VCCP_ICE_1P2: C45.1 C65.1 P16.2 R4.1 R55.2 U4.14 U4.36 | length 1344.3
  Top Layer w7: v2(2649,1406) 2666.3,1388.7 U4.14@2695.67,1388.7 ; U4.36@2924.02,1369.02 2940.98,1369.02 2953,1357 C45.1@3066,1357
  Top Layer w15: R4.1@2476.5,1741.06 C65.1@2476.5,1690 2476.5,1623.5 P16.2@2500,1600
  Bottom Layer w7: P16.2@2500,1600 2529,1600 2604,1525 2604,1451 ; v2(2649,1406) 2604,1451 ; v2(3012,1356) 2984.5,1328.5 2956.44,1328.5 2891,1263.06 2891,1207 2863,1179 2717,1179 2604,1292 2604,1451
VCCP_ICE_SYS: C35.2 C44.2 P11.2 R45.2 R49.1 U4.16 | length 1698.1
  Top Layer w7: v2@2420,1315 2441.5,1336.5 C35.2@2441.5,1370 ; C35.2@2449.65,1361.85 2460.5,1351 2623,1351 2640,1334 2663.06,1334 2678.39,1349.33 U4.16@2695.67,1349.33
  Top Layer w10: C44.2@3054.69,1450 3065,1450 v2(3080,1465) 3065,1480 R49.1@3054.68,1480
  Top Layer w20: C35.2@2441.5,1370 2441.5,1441.5 P11.2@2500,1500
  Bottom Layer w7: v2@2420,1315 2410,1315 2420,1305 2420,1185.2 2544.2,1061 2889.86,1061 2977.5,1148.64 2977.5,1148.76 3002,1173.26 3002,1248.06 3044.44,1290.5 3044.5,1290.5 3086,1332 3086,1459 v2(3080,1465)
  other v2: 2419,1315
VCCP_M3_0P6: C38.2 R3.2 R51.1 R52.2 U4.2 U18.1 | length 991
  Top Layer w7: U4.2@2878.74,1473.35 2878.74,1488.74 2890,1500 2910,1500 2936,1526 2949.5,1526 C38.2@2983.5,1560
  Top Layer w10: R51.1@3129.68,1410 3129.68,1436.68 3145,1452 3145,1605.31
  Top Layer w20: C38.2@2988.5,1560 2988.5,1566.33 3031.18,1609 3222,1609 v2(3324.28,1506.72)
  Bottom Layer w20: v2(3324.28,1506.72) 3328.56,1502.44 R52.2@3443,1502.44 R3.2@3491,1502.44 ; R3.2@3491,1501.44 3500.73,1511.17 U18.1@3556,1511.17
VCCP_M3_1P2: C29.2 C36.2 I2.2 R1.2 R13.2 R44.1 U8.1 | length 978.2
  Bottom Layer w20: v1(2715,1010) 2867.85,1010 2904.98,1047.13 2970.87,1047.13 3017.75,1094 3116,1094 3353.44,1331.44 R13.2@3443,1331.44 R1.2@3491,1331.44 3500.73,1341.17 U8.1@3556,1341.17
VCCP_M3_VBATT: C32.2 C41.2 I3.2 R2.2 R16.2 R47.1 U17.1 | length 692.3
  Bottom Layer w20: v1(2930,1010) 2975,1010 3032,1067 3252,1067 3345.44,1160.44 R2.2@3491,1160.44 ; R2.2@3491,1161.44 3500.73,1171.17 U17.1@3556,1171.17
WAKE: R87.1 U4.18 U4.23 | length 688.5
  Top Layer w7: v2(2502,1319) 2519.88,1336.88 2601.12,1336.88 2608,1330 2608,1295.12 2621.12,1282 2649,1282 2673,1306 2691.71,1306 U4.18@2695.67,1309.96 ; R87.1@2668.11,1133.35 2678.35,1133.35 2725,1180 2725,1195 2760.63,1230.63 U4.23@2760.63,1245
  Bottom Layer w7: v2(2502,1319) 2541,1319 v2(2709.07,1150.93)
pads on no net: D2.2 F1.3 F1.4 F1.5 F1.6 F1.7 F1.8 F1.10 F1.11 F1.13 F1.15 F1.53 H2.4 P1.4 P3.2 P3.3 P12.8 P12.10 R97.2 S5.1 S5.4 S6.1 S6.4 S7.1 S7.4 U1.A1 U1.A10 U1.B8 U1.B9 U1.B10 U1.C2 U1.C3 U1.C9 U1.C10 U1.D9 U1.D10 U1.E9 U1.E10 U1.F9 U1.F10 U1.G9 U1.G10 U1.H9 U1.H10 U1.J10 U2.2 U4.21 U4.28 U5.2 U7.2 U7.3 U7.6 U7.8 U7.9 U7.10 U7.11 U7.12 U7.13 U7.14 U7.19 U7.22 U7.23 U7.24 U7.27 U7.28 X1.1
copper on no net:
  other v4: 1100,1100 1100,5100 5000,5100

## Polygon pours and split planes (outlines as drawn)
no net on Top Overlay "Mid-Layer 1-No Net" (solid): 3686.36,2006.18 3686.36,2096.59 3720.4,2096.59 3720.4,2226.78 3686.75,2226.53 3686.75,2317.53 3824.75,2317.53 3905.75,2201.46 3984.75,2317.53 4120.75,2317.53 4120.75,2226.53 4090.75,2226.53 4090.75,2096.53 4120.75,2096.53 4120.75,2006.53 3954.75,2006.53 3954.75,2096.53 3992.75,2096.53 3992.75,2172.53 3905.75,2056.81 3818.75,2172.53 3818.75,2096.59 3852.79,2096.59 3852.79,2006.18
VCC_1P2 on Mid-Layer 2 "Mid-Layer 1-No Net" (solid, pour order 10): 4549,1575 4806,1832 4958,1832 5007,1881 5007,1952 4930,2029 3436,2029 3105,2360 3105,2700 2995,2810 2935,2810 2850,2725 2675,2725 2635,2765 2635,2855 2555,2935 2405,2935 2350,2880 2350,1625 2400,1575
VCC_PRE on Mid-Layer 2 "Bottom Layer-No Net 1" (solid, pour order 14): 2065,1555 2025,1515 2025,1480 2385,1120 4764,1120 5007,1364 5008,1716 4958,1766 4740,1766 4549,1575 2300,1575 2280,1555
VCC_B0 on Mid-Layer 2 "Mid-Layer 1-No Net" (solid, pour order 11): 5115,1000 5115,2250 4930,2435 4855,2435 4685,2265 4685,2074 4730,2029 5007,2029 5007,1364 4764,1120 2385,1120 2025,1480 2025,1515 2065,1555 2280,1555 2350,1625 2350,2880 2405,2935 2555,2935 2635,2855 2635,2765 2675,2725 2850,2725 2985,2860 2985,2940 2885,3040 1500,3040 1340,2880 1340,2010 2350,1000
M3_VCC_1P2 on Mid-Layer 2 "Mid-Layer 2-No Net" (solid, pour order 12): 4449,2769 4449,2825 4477,2853 4522,2853 4550,2825 4550,2749 4430,2629 4243,2629 3660,3212 3660,4054 3660,4103 4070,4513 4328,4771 4393,4771 4415,4749 4415,4559 3930,4074 3930,3194 4355,2769 4355,2757 4369,2743 4423,2743 4449,2769
M3_VCC_0P6 on Mid-Layer 2 "Mid-Layer 2-No Net" (solid, pour order 13): 4449,2769 4423,2743 4369,2743 4355,2757 4355,4499 4415,4559 4415,4749 4393,4771 4234,4771 4211,4794 4211,4857 4259,4905 4367,4905 4415,4857 4415,4807 4451,4771 4485,4771 4613,4643 4613,4099 4642,4070 4689,4070 4708,4051 4708,3084 4449,2825
M3_VCC_BAT on Mid-Layer 2 "Mid-Layer 2-No Net" (solid, pour order 15): 4550,2769 4574,2745 4638,2745 4952,3059 4952,3173 4952,4620 4664,4908 4466,4908 4415,4857 4415,4807 4451,4771 4485,4771 4613,4643 4613,4099 4642,4070 4689,4070 4708,4051 4708,2983 4550,2825 4550,2769
GND on Mid-Layer 1 "Mid-Layer 1-No Net" (solid, pour order 9): 965,975 5125,975 5125,5325 965,5325

## Keep-outs
Keep-Out Layer:
  the board outline again, w10

## Other copper
Top Layer:
  region net VCCP_M3_VBATT: 2880,1075 2915,1110 2975,1110 2975,1010 2965,1000 2910,1000 2880,1030
  region net VCCP_M3_1P2: 2660,1110 2710,1110 2745,1075 2745,1025 2720,1000 2665,1000 2655,1010 2660,1015
  region net VCC_GOC: 2650,1660 2745,1685 2745,1630 2660,1555 2660,1600

## Silkscreen, mask and mechanical layers (free items; w line width, h text height)
Top Overlay:
  lines w8: 4745,2245 4715,2245 4715,2355 4745,2355
  text "DOUT" at 2280,5136 h40 r270
  text "COUT" at 2480,5136 h40 r270
  text "V0P6" at 2780,5136 h40 r270
  text "VBAT" at 2980,5136 h40 r270
  text "ICE_INTERFACE" at 3094,5135 h40 r270
  text "V1P2" at 2880,5129.34 h40 r270
  text "EMO" at 2180,5096.01 h40 r270
  text "GND" at 2680,5096.01 h40 r270
  text "DIN" at 2380,5089.35 h40 r270
  text "CIN" at 2580,5089.35 h40 r270
  text "EDI" at 1980,5082.68 h40 r270
  text "ECI" at 2080,5082.68 h40 r270
  text "GND" at 3265,4580 h40
  text "DOUT" at 2788,4480 h40
  text "DIN" at 2834.65,4380 h40
  text "GND" at 1050,4367 h40
  text "COUT" at 2788,4280 h40
  text "CIN" at 2834.65,4180 h40
  text "EMO" at 2827.99,4080 h40
  text "ECI" at 2841.32,3980 h40
  text "EDI" at 2841.32,3880 h40
  text "M3" at 4199,3409 h80
  text "M3IO_0" at 2280,3125 h40 r270
  text "M3IO_1" at 2380,3125 h40 r270
  text "M3IO_2" at 2480,3125 h40 r270
  text "M3IO_3" at 2580,3125 h40 r270
  text "M3IO_4" at 2680,3125 h40 r270
  text "M3IO_5" at 2780,3125 h40 r270
  text "M3IO_6" at 2880,3125 h40 r270
  text "M3IO_7" at 2980,3125 h40 r270
  text "M3IO_8" at 3080,3125 h40 r270
  text "M3IO_9" at 3205,3125 h40 r270
  text "M3IO_10" at 3280,3125 h40 r270
  text "M3IO_11" at 3380,3125 h40 r270
  text "M3IO_12" at 3480,3125 h40 r270
  text "M3IO_13" at 3580,3125 h40 r270
  text "M3IO_14" at 3680,3125 h40 r270
  text "M3IO_15" at 3780,3125 h40 r270
  text "M3IO_16" at 3880,3125 h40 r270
  text "M3IO_17" at 3980,3125 h40 r270
  text "M3IO_18" at 4080,3125 h40 r270
  text "M3IO_19" at 4180,3125 h40 r270
  text "M3IO_20" at 4280,3125 h40 r270
  text "M3IO_21" at 4380,3125 h40 r270
  text "M3IO_22" at 4480,3125 h40 r270
  text "M3IO_23" at 4580,3125 h40 r270
  text "M3SPI_TXD" at 4680,3125 h40 r270
  text "M3SPI_CLK" at 4780,3125 h40 r270
  text "M3SPI_FSS" at 4880,3125 h40 r270
  text "M3SPI_RXD" at 4980,3125 h40 r270
  text "GND" at 1645,3060 h40
  text "GND" at 4758,2680 h40
  text "M3_VSOL" at 4280,2600 h40 r270
  text "M3_0.6V" at 4380,2600 h40 r270
  text "M3_1.2V" at 4480,2600 h40 r270
  text "M3_VBATT" at 4580,2600 h40 r270
  text "FP4" at 4795,2570 h40
  text "SYS_CLK" at 1890,2441 h40
  text "EXT_PWR" at 4325,2073 h40
  text "M3 ICE & Interface" at 3576,1912 h40
  text "USBV" at 2163,1874 h40
  text "Board" at 3816,1847 h40
  text "1.2V" at 2162,1815 h40
  text "3.3V" at 2158,1758 h40
  text "M3_0.6V" at 4300,1531 h40
  text "M3_1.2V" at 4300,1353 h40
  text "GND" at 4865,1278 h40
  text "M3_VBATT" at 4300,1172 h40
  text "GND" at 1529,1081 h40
  text "ICE_PWR <--> EXT_PWR" at 3637,1031 h40